# Altium PCB PCB1.PcbDoc
Units mm, origin at the board's own origin, x right, y up, seen from the top; angles counter-clockwise.
Board outline 22.86 x 12.45 mm, 2 copper layers (Top Layer, Bottom Layer); 13 components, 6 nets, 33 pads, 29 vias.
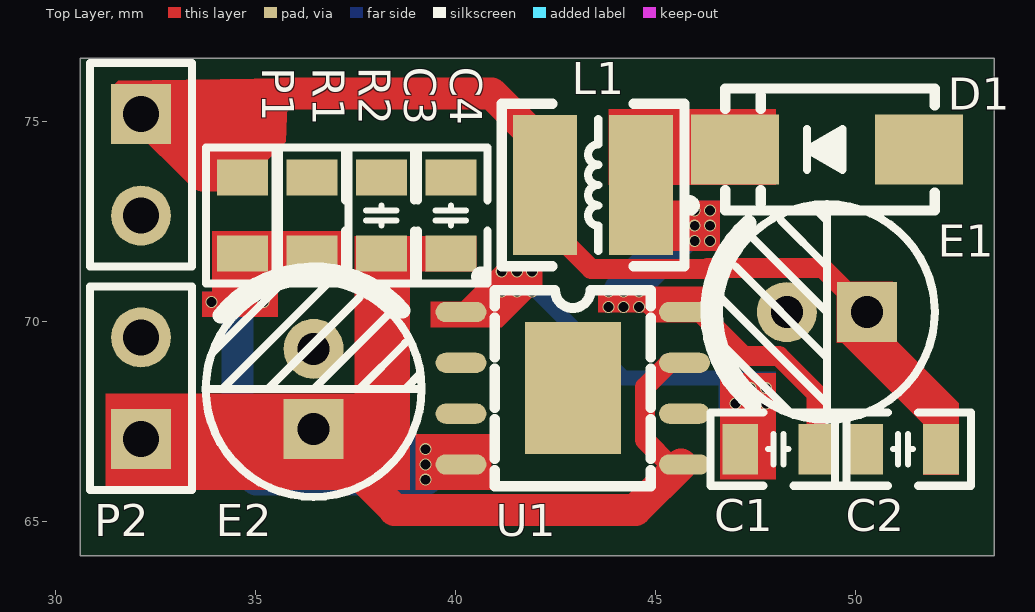
[diagram p0: Top Layer view]
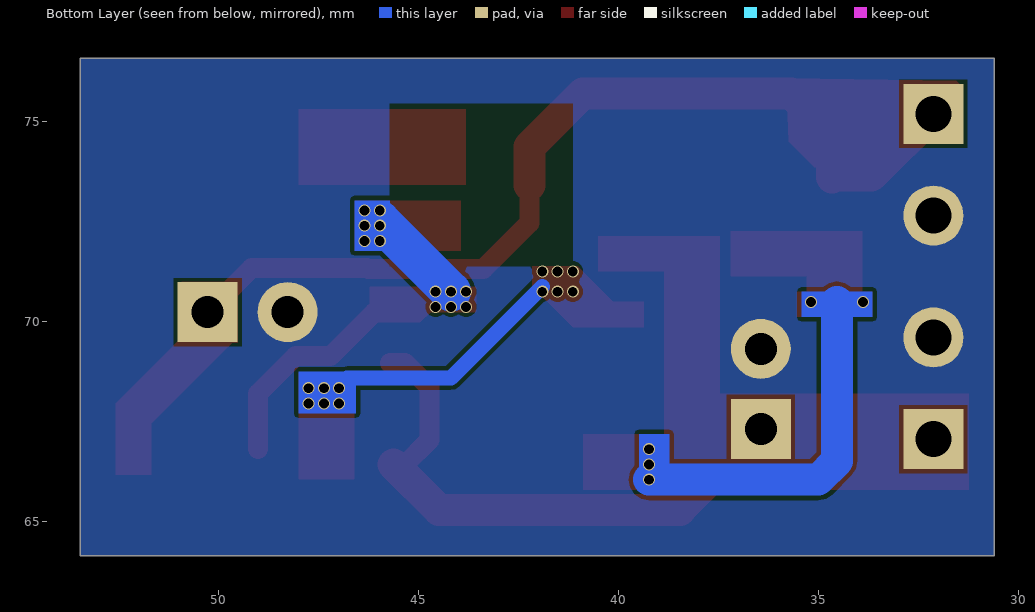
[diagram p1: Bottom Layer view, seen from below]
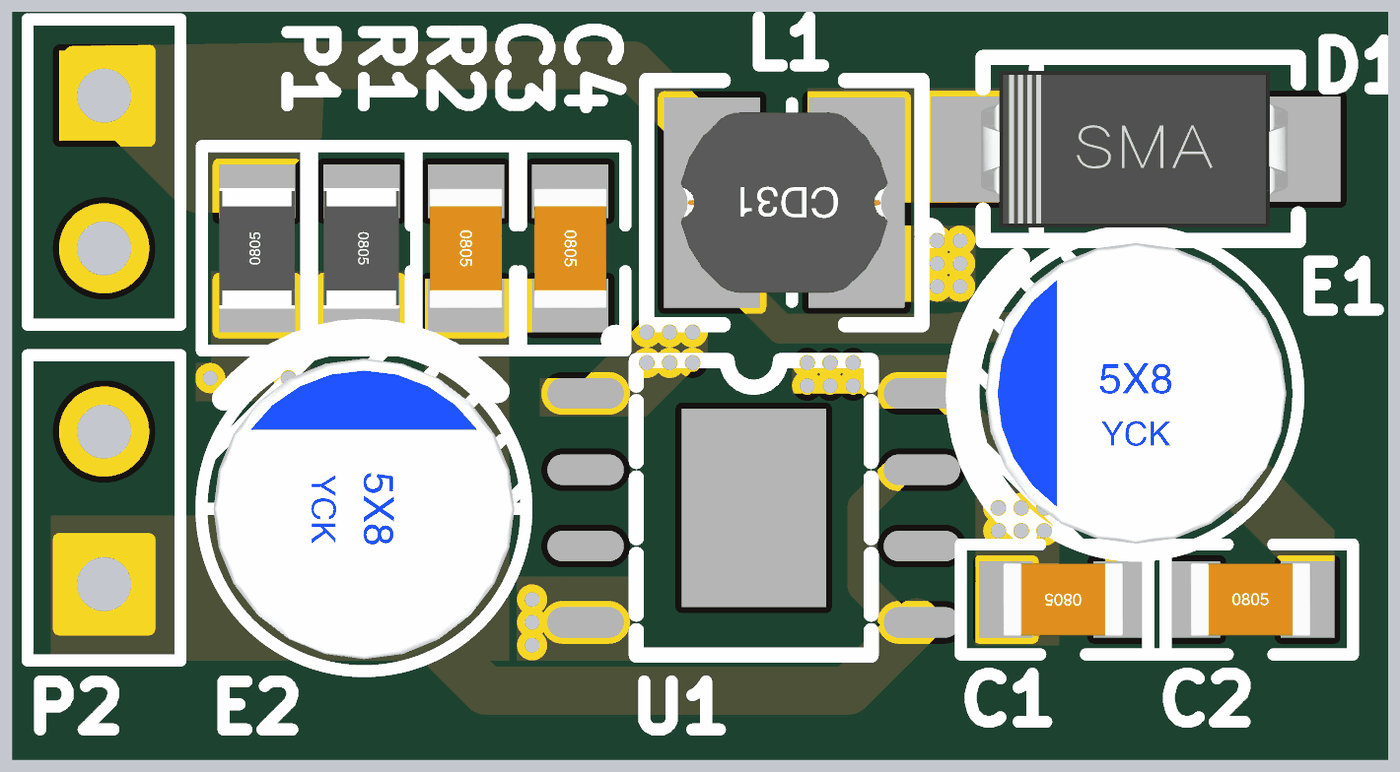
[diagram p2: 3D render of the assembled board from above, using the file's embedded part models]

## Layer stack, top to bottom
Top Solder: solder mask 0.0102, Solder Resist, Dk 3.5
Top Layer: signal copper 0.0356
Dielectric 1: dielectric 0.32, FR-4, Dk 4.8
Bottom Layer: signal copper 0.0356
Bottom Solder: solder mask 0.0102, Solder Resist, Dk 3.5

## Board outline
30.607,64.135 30.607,76.581 53.467,76.581 53.467,64.135

## Design rules (kind name [scope] priority, off if disabled: settings)
Clearance [All] p1: gap=0.1 ignorepadtopadclearanceinfootprint=FALSE
PolygonConnect [All] p1: connectstyle=Direct reliefconductorwidth=0.254 reliefentries=4 polygonreliefangle="90 Angle" airgapwidth=0.254
RoutingVias [All] p1: holewidth=0.711 width=1.27 viastyle="Through Hole" minholewidth=0.711 minwidth=1.27 maxholewidth=0.711 maxwidth=1.27
SolderMaskExpansion [All] p1: expansion=0.102 istentingtop=FALSE
Width [All] p1: maxlimit=1 minlimit=0.254 preferedwidth=0.8
30 further rules are at their usual default settings.

## Classes and differential pairs
component class Sheet1: C1 C2 C3 C4 D1 E1 E2 L1 P1 P2 R1 R2

## Components (designator, comment, footprint, x,y, rotation, side; value= is the part's Value field where it differs from the comment)
C1 "104" "C 0805_L" 48.067,66.802 r180 top
C2 "104" "C 0805_L" 51.181,66.802 r0 top
C3 "104" "C 0805_L" 38.142,72.644 r270 top
C4 "104" "C 0805_L" 39.878,72.644 r270 top
D1 "SS14" SMA 49.276,74.295 r180 top
E1 "10uF/6.3V" "CS 2.0*5*8 - C" 49.276,70.231 r0 top
E2 "10uF/6.3V" "CS 2.0*5*8 - C" 36.449,68.31 r270 top
L1 "10uH" CD31 43.434,73.406 r180 top
P1 "Header 2" HDR1X2 32.131,75.184 r270 top
P2 "Header 2" HDR1X2 32.131,67.056 r90 top
R1 "1K" "R 0805_L" 34.671,72.644 r90 top
R2 "1K" "R 0805_L" 36.407,72.644 r270 top
U1 "TPS5450DDA" SOP-8_L4.9-W3.9-P1.27-LS6.0-TL-EP-1 42.862,68.498 r0 top

## Footprints (in the part's own frame and the unit in brackets; to place one, negate y for a bottom-side part, rotate by r counter-clockwise, add the part's x,y. Pads: shape width x height; smd on the part's side, far side on the other; paste and mask are expansions set on the pad)
"C 0805_L" [mil] "无极性贴片电容"
  rect 35x50 smd: 1(-37.4,0) 2(37.4,0)
  silkscreen extent -67,-36 67,36, body extent -39,-24 39,24, height 20
CD31 [mm] "3.5*3*1mm（长宽高）"
  rect 1.6x3.5 smd: 1(-1.2,0) 2(1.2,0)
  silkscreen extent -2.29,-2.03 2.29,2.03, body extent -1.72,-1.5 1.72,1.5, height 1.2
"CS 2.0*5*8 - C" [mm] "脚距2mm , 直径5mm , 高8mm"
  rect 1.5x1.5 hole 0.8: 1(1,0)
  round 1.5 hole 0.8: 2(-1,0)
  silkscreen extent -2.96,-2.7 2.7,2.7, body extent -2.5,-2.5 2.5,2.5, height 8.02
HDR1X2 [mm] "Connector; Header; 2 Position"
  rect 1.5x1.5 hole 0.9: 1(0,0)
  round 1.5 hole 0.9: 2(2.54,0)
  silkscreen extent -1.27,-1.27 3.81,1.27
"R 0805_L" [mil] "1/8W贴片电阻   https://item.taobao.com/item.htm?ft=t&id=613637044352"
  rect 35x50 smd: 1(-37.4,0) 2(37.4,0)
  silkscreen extent -67,-36 67,36, body extent -39,-25 39,25, height 20
SMA [mm] "4.5x2.6*2.2mm（长宽高，不包括引脚）"
  rect 2.2x1.75 smd: 1(-2.3,0) 2(2.3,0)
  silkscreen extent -2.7,-1.52 3.56,1.52, body extent -2.53,-1.3 2.58,1.3, height 2.15
SOP-8_L4.9-W3.9-P1.27-LS6.0-TL-EP-1 [mil]
  oval 50x20 smd: 1(-107.5,68.23) 2(-107.5,18.23) 3(-107.5,-31.77) 4(-107.5,-81.77) 5(112.5,-81.77) 6(112.5,-31.77) 7(112.5,18.23) 8(112.5,68.23)
  rect 94.49x129.92 smd: 9(2.5,-6.77)
  silkscreen extent -92,-103 79,108

## Part data
C1 C2 C3 C4: library part C, "贴片电容", BOM名称=贴片电容, 下单链接=https://item.taobao.com/item.htm?ft=t&id=613637044352, 淘宝ID=小糖豆的小窝窝
D1: "肖特基二极管", BOM名称=肖特基二极管, 下单链接=https://item.taobao.com/item.htm?ft=t&id=613637044352, 淘宝ID=小糖豆的小窝窝
E1 E2: library part CS, "直插固态电容", BOM名称=直插固态电容, 下单链接=https://item.taobao.com/item.htm?ft=t&id=613637044352, 淘宝ID=小糖豆的小窝窝
L1: library part L-SMD, "CD系列贴片线绕功率电感", BOM名称=CD系列贴片线绕功率电感, 下单链接=https://item.taobao.com/item.htm?ft=t&id=613637044352, 淘宝ID=小糖豆的小窝窝
P1 P2: "Header, 2-Pin", LatestRevisionDate=17-Jul-2002, LatestRevisionNote="Re-released for DXP Platform.", Publisher="Altium Limited"
R1 R2: library part R, "贴片电阻", BOM名称=贴片电阻, 下单链接=https://item.taobao.com/item.htm?ft=t&id=613637044352, 淘宝ID=小糖豆的小窝窝

## Via types
v1: diameter 0.3, hole 0.246, Top Layer to Bottom Layer, 29 vias

## Nets (pads, with @x,y where several pads share a name; then routed paths per layer and width w, separated by ;. In a path a pad name is that pad's centre, name@x,y a point inside that pad or via, vN(x,y) a via of type N, cw(c..) or ccw(c..) an arc to the next point about the centre after c; other vN are vias at no path point)
GND: C2.1 C3.1 C4.1 D1.1 E1.2 E2.2 P1.2 P2.2 R2.1 U1.6 U1.9
NetC1_1: C1.1 D1.2 L1.1 U1.8 | length 8.2
  Top Layer w0.5: U1.8 46.101,70.231 47.201,69.131 48.077,69.131 49.017,68.191 C1.1
  Bottom Layer w1: v1(44.196,70.739) 45.974,72.517 46.101,72.517
  other v1: 43.815,70.358 44.196,70.358 44.577,70.358 43.815,70.739 44.577,70.739 45.974,72.009 46.355,72.009 45.974,72.39 46.355,72.39 45.974,72.771 46.355,72.771
NetC1_2: C1.2 U1.1 | length 5.8
  Bottom Layer w0.381: v1@41.91,70.866 44.196,68.58 46.79,68.58
  other v1: 46.99,67.945 47.371,67.945 47.752,67.945 46.99,68.326 47.371,68.326 47.752,68.326 41.148,70.739 41.529,70.739 41.91,70.739 41.148,71.247 41.529,71.247 41.91,71.247
NetC2_2: C2.2 E1.1 L1.2 P1.1 R1.2 | length 23.7
  Top Layer w0.5: L1.2 42.234,72.456 43.384,71.306 46.268,71.306 46.293,71.331 49.176,71.331 E1.1
  Top Layer w0.8: P1.1 33.677,73.638 34.627,73.638 R1.2 34.671,74.676 35.687,75.692 40.898,75.692 42.234,74.356 L1.2
NetC3_2: C3.2 C4.2 E2.1 P2.1 U1.5 U1.7 | length 14.3
  Top Layer w0.5: U1.5 45.631,66.421 45.341,66.421 44.735,67.027 44.735,68.355 45.341,68.961 U1.7
  Top Layer w0.8: E2.1 38.473,65.286 44.496,65.286 U1.5@45.631,66.421
NetR1_1: R1.1 R2.2 U1.4 | length 8.9
  Bottom Layer w0.8: 34.544,70.485 34.544,66.509 35.013,66.04 v1(39.243,66.04)
  other v1: 39.243,66.421 39.243,66.802 33.894,70.485 35.194,70.485
pads on no net: U1.2 U1.3

## Polygon pours and split planes (outlines as drawn)
GND on Bottom Layer "NONET_L-01_P-001" (solid, pour order 0): 30.607,76.581 30.607,64.135 53.467,64.135 53.467,76.581

## Other copper
Top Layer:
  rectangle net NetC1_1: 43.942,71.755 46.609,73.025
  rectangle net NetR1_1: 33.655,70.104 35.56,70.739
  rectangle net NetR1_1: 38.989,65.786 40.894,67.183
  rectangle net NetR1_1: 33.909,70.104 35.306,71.501
  rectangle net NetC1_2: 46.609,66.04 48.006,68.707
  rectangle net NetC1_1: 43.815,73.406 48.006,75.311
  rectangle net NetC3_2: 37.465,71.247 40.513,72.136
  rectangle net NetR1_1: 33.909,71.12 37.211,72.263
  rectangle net NetC3_2: 37.465,68.072 38.862,72.136
  rectangle net NetC3_2: 31.242,65.786 38.862,68.199
  region net NetC1_1: 43.561,70.231 44.704,70.231 44.958,69.977 46.228,69.977 46.228,70.866 43.561,70.866
  region net NetC2_2: 31.432,75.882 31.559,76.01 35.814,76.073 35.75,74.486 35.115,73.85 33.591,73.85
  region net NetC2_2: 49.53,70.993 49.53,69.469 49.657,69.469 51.689,67.437 51.689,66.167 52.578,66.167 52.578,67.945 50.927,69.596 50.927,70.993
  region net NetC1_2: 39.37,70.485 40.132,70.485 41.021,71.374 42.164,71.374 42.164,70.866 41.148,69.85 39.37,69.85
Bottom Layer:
  rectangle net NetC1_1: 45.72,71.755 46.609,73.025
  rectangle net NetR1_1: 33.655,70.104 35.433,70.739
  rectangle net NetR1_1: 38.735,65.786 39.497,67.183
  rectangle net NetC1_2: 46.57,67.691 48.006,68.746
  pour cut-out: 41.148,75.438 45.72,75.438 45.72,71.374 41.148,71.374

## Silkscreen, mask and mechanical layers (free items; w line width, h text height)
Mechanical 1:
  the board outline again, w0.8